# Altium PCB fuente 220V 12V 2A.PcbDoc
Units mil, origin at the board's own origin, x right, y up, seen from the top; angles counter-clockwise.
Board outline 5112.5 x 2362.5 mil, 2 copper layers (Top Layer, Bottom Layer), stack 65.792 mil thick; 92 components, 81 nets, 307 pads, 0 vias.
Unrouted connection lines stored in the file: 1.
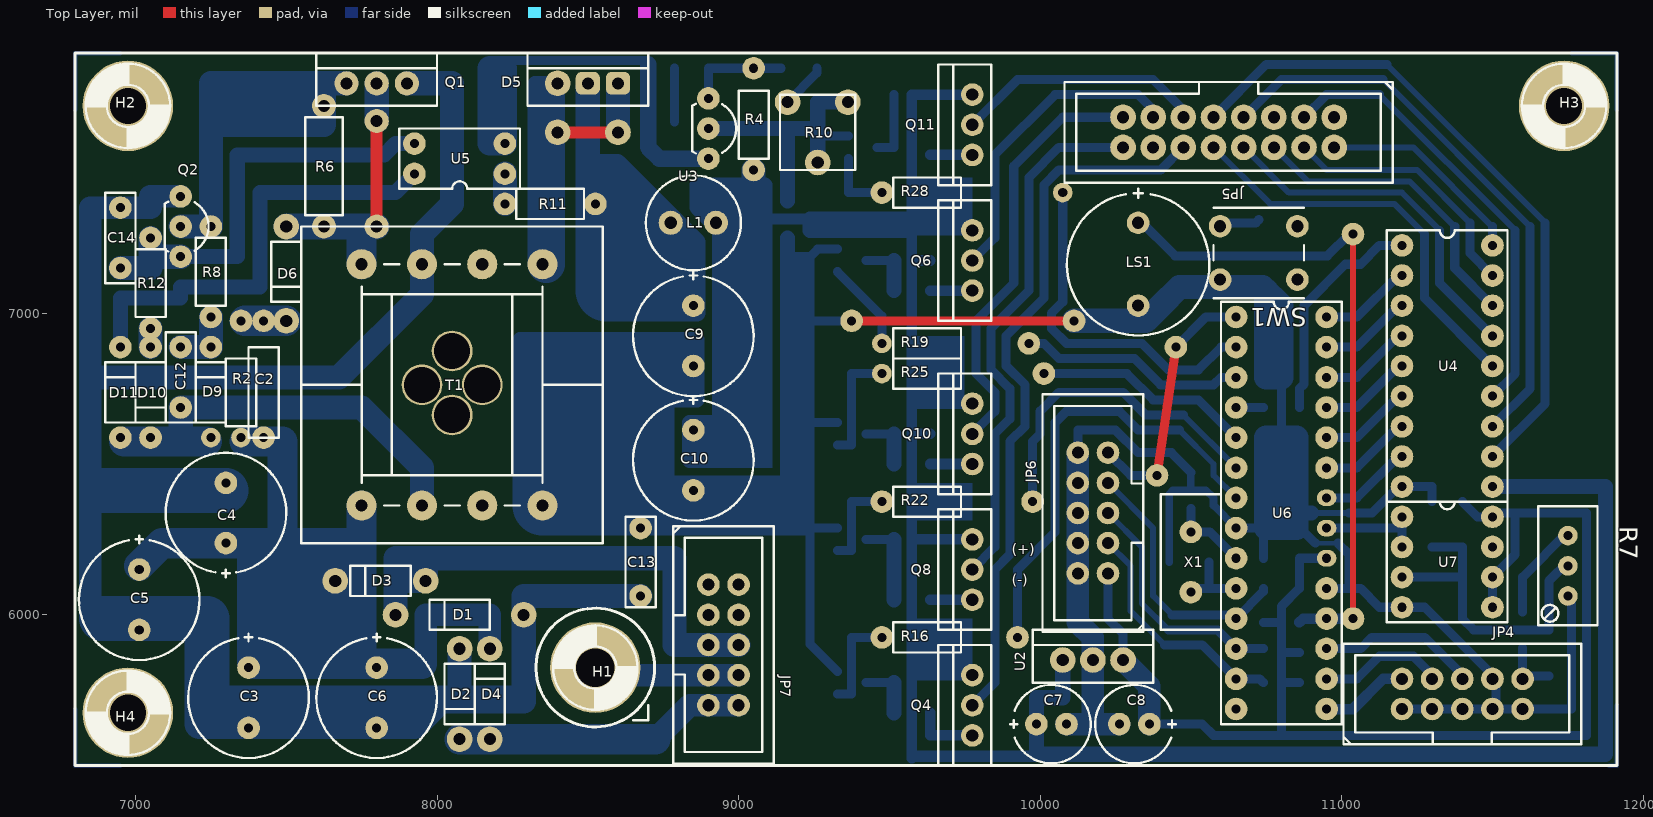
[diagram p0: Top Layer view]
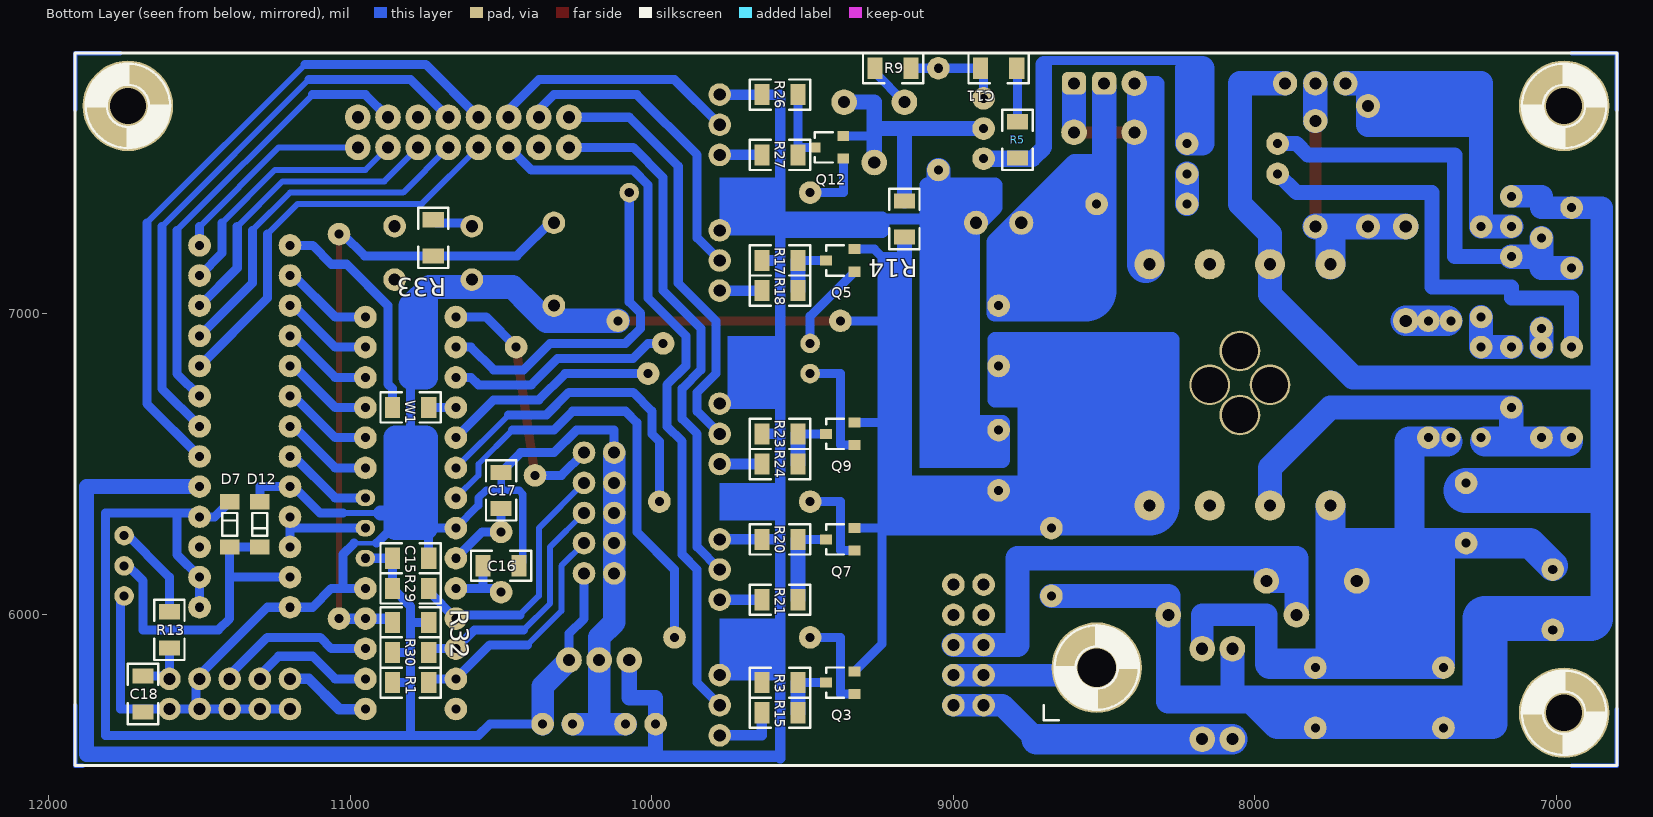
[diagram p1: Bottom Layer view, seen from below]
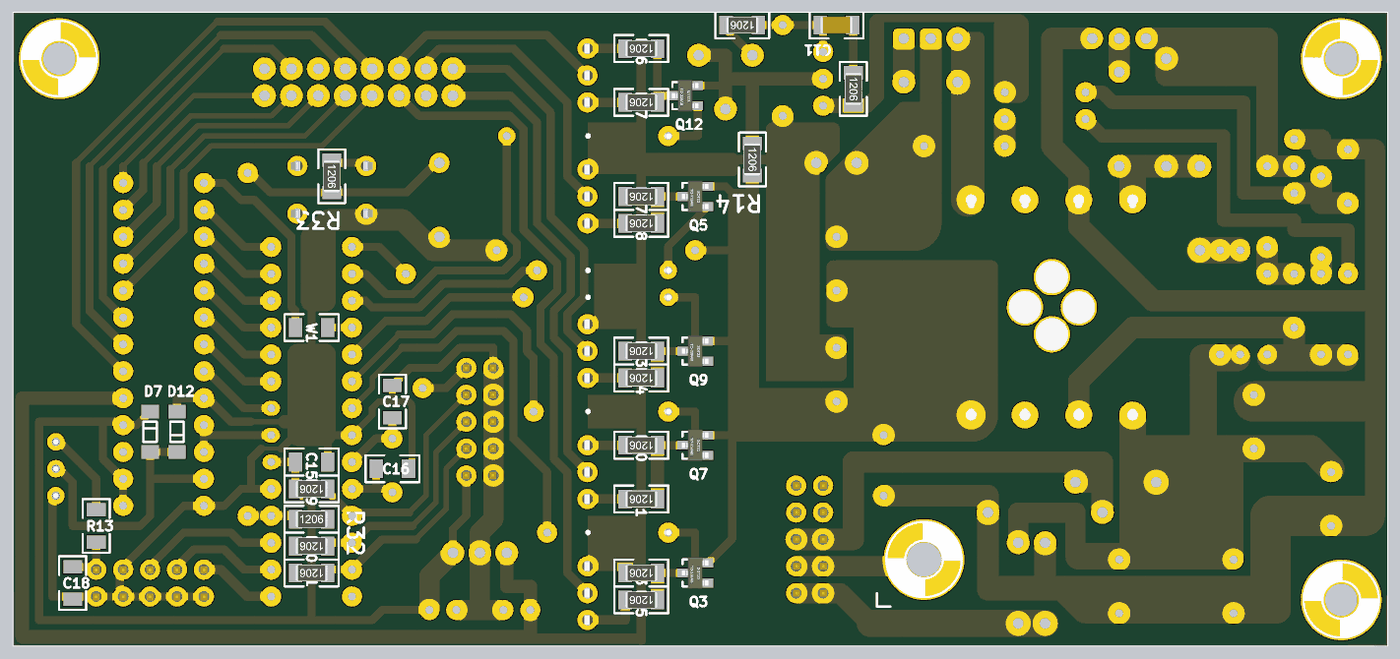
[diagram p2: 3D render of the assembled board from below, using the file's embedded part models]

## Layer stack, top to bottom
Top Layer: signal copper 1.4
Dielectric: core 62.9921, FR-4, Dk 4.8
Bottom Layer: signal copper 1.4

## Board outline
6800,5500 11912.5,5500 11912.5,7862.5 6800,7862.5

## Design rules (kind name [scope] priority, off if disabled: settings)
Clearance [All] p1: gap=12.5
PolygonConnect [All] p1: connectstyle=Relief reliefconductorwidth=10 reliefentries=4 polygonreliefangle="90 Angle"
RoutingVias [All] p1: holewidth=28 width=50 viastyle="Through Hole" minholewidth=28 minwidth=50 maxholewidth=28 maxwidth=50
SilkscreenOverComponentPads [All] p1: minsilkscreentomaskgap=10
SolderMaskExpansion [All] p1: expansion=4
Width [All] p1: maxlimit=1000 minlimit=10 preferedwidth=10
27 further rules are at their usual default settings.

## Components (designator, comment, footprint, x,y, rotation, side; value= is the part's Value field where it differs from the comment)
C2 "Cap" CAP200th 7425,6737.5 r270 top
C3 "Cap Pol" cap10mm 7375,5725 r270 top
C4 "Cap Pol" cap10mm 7300,6337.5 r90 top
C5 "Cap Pol" cap10mm 7012.5,6050 r270 top
C6 "Cap Pol" cap10mm 7800,5725 r270 top
C7 "Cap Pol" Cap6.5mm 10037.5,5637.5 r0 top
C8 "Cap Pol" Cap6.5mm 10312.5,5637.5 r180 top
C9 "Cap Pol" cap10mm 8850,6925 r270 top
C10 "Cap Pol" cap10mm 8850,6512.5 r270 top
C11 "Cap" C1206 8850,7812.5 r0 bottom
C12 "Cap" cap200th#1 7150,6787.5 r90 top
C13 "Cap" cap200th#2 8675,6175 r90 top
C14 "Cap" cap200th#1 6950,7250 r270 top
C15 "Cap" 1206NP 10800,6187.5 r180 bottom
C16 "Cap" 1206NP 10500,6162.5 r0 bottom
C17 "Cap" 1206NP 10500,6412.5 r270 bottom
C18 "Cap" 1206NP 11687.5,5737.5 r90 bottom
D1 "1N4007" diode300_1mm#1 8075,6000 r180 top
D2 "1N4007" diode300_1mm#2 8075,5737.5 r270 top
D3 "1N4007" diode300_1mm#2 7812.5,6112.5 r180 top
D4 "1N4007" diode300_1mm#2 8175,5737.5 r90 top
D5 "MBR20100" TO220#1 8500,7762.5 r0 top
D6 "UF4007" diode300_1mm#3 7500,7137.5 r270 top
D7 "1N4148" DSMD1MM 11400,6300 r270 bottom
D9 "1N4148" DIODE300#1 7250,6737.5 r90 top
D10 "Zener" DIODE300#2 7050,6737.5 r270 top
D11 "1N4148" DIODE300#2 6950,6737.5 r90 top
D12 "1N4148" DSMD1MM 11300,6300 r90 bottom
H1 "Agujero de montaje" agujero#1 8525,5825 r270 top
H2 "Agujero de montaje" agujero#2 6975,7687.5 r90 top
H3 "Agujero de montaje" agujero#2 11737.5,7687.5 r0 top
H4 "Agujero de montaje" agujero#2 6975,5675 r180 top
JP4 "IDC 5x2" idc5x2 11400,5737.5 r0 top
JP5 "Header8x2" idc8x2 10775,7600 r180 top
JP6 "IDC 5x2" idc5x2 10175,6337.5 r90 top
JP7 "IDC 5x2" idc5x2 8950,5900 r270 top
L1 "Inductor" ind8mm 8850,7300 r0 top
LS1 "Buzzer" buzzer12mm 10325,7162.5 r270 top
Q1 "MJE13007" TO220#2 7800,7762.5 r0 top
Q2 "2SC1815" to92 7150,7287.5 r270 top
Q3 "BC817-40" SOT23 9375,5775 r90 bottom
Q4 "IRF9520" TO220#3 9775,5700 r90 top
Q5 "BC817-40" SOT23 9375,7175 r90 bottom
Q6 "IRF9520" TO220#3 9775,7175 r90 top
Q7 "BC817-40" SOT23 9375,6250 r90 bottom
Q8 "IRF9520" TO220#3 9775,6150 r90 top
Q9 "BC817-40" SOT23 9375,6600 r90 bottom
Q10 "IRF9520" TO220#3 9775,6600 r90 top
Q11 "IRF9520" TO220#3 9775,7625 r90 top
Q12 "BC817-40" SOT23 9412.5,7550 r90 bottom
R1 "Resistencia 1206; 10Kohm" R1206 10800,5775 r0 bottom
R2 "Res" RES300TH#1 7350,6737.5 r90 top
R3 "Resistencia 1206; 1Kohm" R1206 9575,5775 r0 bottom
R4 "Res" RES300TH#2 9050,7625 r90 top
R5 "Res" R1206 8787.5,7575 r270 bottom
R6 "Res" res400th 7625,7487.5 r90 top
R7 "Preset" PRESET 11750,6162.5 r270 top
R8 "Res" RES300TH#3 7250,7137.5 r90 top
R9 "Res" R1206 9200,7812.5 r0 bottom
R10 "RVar" Preset6 9262.5,7600 r180 top
R11 "Res" RES300TH#3 8375,7362.5 r180 top
R12 "Res" RES300TH#3 7050,7100 r270 top
R13 "Res" 1206NP 11600,5950 r270 bottom
R14 "Resistencia 1206; 0ohm" R1206 9162.5,7312.5 r270 bottom
R15 "Resistencia 1206; 10ohm" R1206 9575,5675 r0 bottom
R16 "Resistencia 1206; 1Kohm" res300th#1 9625,5925 r180 top
R17 "Resistencia 1206; 1Kohm" R1206 9575,7175 r0 bottom
R18 "Resistencia 1206; 10ohm" R1206 9575,7075 r0 bottom
R19 "Resistencia 1206; 1Kohm" res300th#2 9625,6900 r180 top
R20 "Resistencia 1206; 1Kohm" R1206 9575,6250 r0 bottom
R21 "Resistencia 1206; 10ohm" R1206 9575,6050 r0 bottom
R22 "Resistencia 1206; 1Kohm" res300th#3 9625,6375 r180 top
R23 "Resistencia 1206; 1Kohm" R1206 9575,6600 r0 bottom
R24 "Resistencia 1206; 10ohm" R1206 9575,6500 r0 bottom
R25 "Resistencia 1206; 1Kohm" res300th#4 9625,6800 r180 top
R26 "Resistencia 1206; 1Kohm" R1206 9575,7725 r0 bottom
R27 "Resistencia 1206; 10ohm" R1206 9575,7525 r0 bottom
R28 "Resistencia 1206; 1Kohm" res300th#5 9625,7400 r180 top
R29 "Resistencia 1206; 10Kohm" R1206 10800,6087.5 r0 bottom
R30 "Resistencia 1206; 10Kohm" R1206 10800,5875 r0 bottom
R32 "Resistencia 1206; 10Kohm" R1206 10800,5975 r180 bottom
R33 "Resistencia 1206; 10Kohm" R1206 10725,7250 r270 bottom
SW1 "SW_T_5MM" SW_T_5MM 10725,7200 r180 top
T1 "Transformer 2" "COSMO - EE 2507" 8050,6762.5 r180 top
U2 "LM7805" TO220#4 10175,5850 r0 top
U3 "TL431" TO92 8900,7612.5 r270 top
U4 "ULN2803" DIP18Z 11200,7225 r0 top
U5 "PC817" DIP4Z 8225,7462.5 r180 top
U6 "PIC18F2550" DIP28Z2 10650,6987.5 r0 top
U7 "MCP6002" dip8z 11200,6325 r0 top
W1 "CABLE" 1206NP 10800,6687.5 r180 bottom
X1 "XTAL" XTAL1 10500,6175 r90 top

## Footprints (in the part's own frame and the unit in brackets; to place one, negate y for a bottom-side part, rotate by r counter-clockwise, add the part's x,y. Pads: shape width x height; smd on the part's side, far side on the other; paste and mask are expansions set on the pad)
1206NP [mil]
  rect 50x70 smd: 1(-60,0) 2(60,0)
  silkscreen extent -100,-50 100,50
agujero#1 [mm] "AGUJERO DE MONTAJE"
  round 7.62 hole 3.25: 1(0,0)
  silkscreen extent -3.56,-3.56 4.44,4.45
agujero#2 [mm] "AGUJERO DE MONTAJE"
  round 7.62 hole 3.048: 1(0,0)
  silkscreen extent -3.56,-3.56 4.44,4.44
buzzer12mm [mil] "BUZZER"
  round 75 hole 40: 1(-137.5,0) 2(137.5,0)
  silkscreen extent -250,-236 236,236
C1206 [mil]
  rect 50x70 smd: 1(-60,0) 2(60,0)
  silkscreen extent -100,-50 100,50, body extent -63,-31 63,31, height 33
Cap6.5mm [mil] "CAPACITOR ELECTROLÍTICO"
  round 75 hole 30: 1(-50,0) 2(50,0)
  silkscreen extent -138,-130 130,130
cap10mm [mil] "CAPACITOR ELECTROLÍTICO"
  round 75 hole 30: 1(-100,0) 2(100,0)
  silkscreen extent -212,-200 200,200
CAP200th [mil] "CAPACITOR THROUGH-HOLE"
  round 75 hole 30: 1(-237.5,0) 2(150,0)
  silkscreen extent -150,-50 150,50
cap200th#1 [mil] "CAPACITOR THROUGH-HOLE"
  round 75 hole 30: 1(-100,0) 2(100,0)
  silkscreen extent -150,-50 150,50
cap200th#2 [mil] "CAPACITOR THROUGH-HOLE"
  round 75 hole 30: 1(-112.5,0) 2(112.5,0)
  silkscreen extent -150,-50 150,50
"COSMO - EE 2507" [mil]
  round 100 hole 40: 1(-300,400) 2(-300,-400) 3(100,400) 4(100,-400) 5(300,400) 6(300,-400) 7(-100,400) 8(-100,-400)
  silkscreen extent -500,-525 500,525, body extent -492,-500 492,508, height 772
DIODE300#1 [mil] "DIODO THROUGH-HOLE"
  round 65 hole 30: 1(-150,0)
  round 75 hole 30: 2(150,0)
  silkscreen extent -100,-50 100,50
DIODE300#2 [mil] "DIODO THROUGH-HOLE"
  round 75 hole 30: 1(-150,0) 2(150,0)
  silkscreen extent -100,-50 100,50
diode300_1mm#1 [mil]
  round 85 hole 40: 1(-212.5,0) 2(212.5,0)
  silkscreen extent -100,-50 100,50
diode300_1mm#2 [mil]
  round 85 hole 40: 1(-150,0) 2(150,0)
  silkscreen extent -100,-50 100,50
diode300_1mm#3 [mil]
  round 85 hole 40: 1(-150,0) 2(162.5,0)
  silkscreen extent -100,-50 100,50
DIP4Z [mil] "ZOCALO DIP 4"
  round 75 hole 30: 1(0,0) 2(0,-100) 3(300,-100) 4(300,0)
  silkscreen extent -50,-150 350,50
dip8z [mil] "ZOCALO DIP 8"
  round 75 hole 30: 1(0,0) 2(0,-100) 3(0,-200) 4(0,-300) 5(300,-300) 6(300,-200) 7(300,-100) 8(300,0)
  silkscreen extent -50,-350 350,50
DIP18Z [mil] "ZOCALO DIP18"
  round 75 hole 30: 1(0,0) 2(0,-100) 3(0,-200) 4(0,-300) 5(0,-400) 6(0,-500) 7(0,-600) 8(0,-700) 9(0,-800) 10(300,-800) 11(300,-700) 12(300,-600) 13(300,-500) 14(300,-400) 15(300,-300) 16(300,-200) 17(300,-100) 18(300,0)
  silkscreen extent -50,-850 350,50
DIP28Z2 [mil]
  round 75 hole 30: 1(0,0) 2(0,-100) 3(0,-200) 4(0,-300) 5(0,-400) 6(0,-500) 7(0,-600) 8(0,-700) 9(0,-800) 10(0,-900) 11(0,-1000) 12(0,-1100) 13(0,-1200) 14(0,-1300) 15(300,-1300) 16(300,-1200) 17(300,-1100) 18(300,-1000) 19(300,-900) 23(300,-500) 24(300,-400) 25(300,-300) 26(300,-200) 27(300,-100) 28(300,0)
  oval 65x55 hole 30: 20(300,-800) 21(300,-700) 22(300,-600)
  silkscreen extent -50,-1350 350,50
DSMD1MM [mil] "DIODO SMD"
  rect 50x65 smd: 1(75,0) 2(-75,0)
  silkscreen extent -38,-25 38,25
idc5x2 [mil]
  round 75 hole 40: 1(-200,-50) 2(-200,50) 3(-100,-50) 4(-100,50) 5(0,-50) 6(0,50) 7(100,-50) 8(100,50) 9(200,-50) 10(200,50)
  silkscreen extent -394,-167 394,167, body extent -400,-169 400,180, height 117
idc8x2 [mil]
  round 85 hole 40: 1(-200,-50) 2(-200,50) 3(-100,-50) 4(-100,50) 5(0,-50) 6(0,50) 7(100,-50) 8(100,50) 9(200,-50) 10(200,50) 11(300,-50) 12(300,50) 13(400,-50) 14(400,50) 15(500,-50) 16(500,50)
  silkscreen extent -394,-167 694,167
ind8mm [mil]
  round 80 hole 40: 1(-75,0) 2(75,0)
  silkscreen extent -157,-157 157,157
PRESET [mil]
  round 65 hole 30: 1(-100,0) 2(0,0) 3(100,0)
  silkscreen extent -197,-98 197,98, body extent -188,-95 188,95, height 455
Preset6 [mil]
  round 85 hole 40: 1(-100,-100) 2(0,100) 3(100,-100)
  silkscreen extent -125,-125 125,125
R1206 [mil]
  rect 50x70 smd: 1(-60,0) 2(60,0)
  silkscreen extent -100,-50 100,50, body extent -63,-31 63,31, height 34
RES300TH#1 [mil] "RESISTENCIA THROUGH-HOLE"
  round 65 hole 30: 1(-150,0)
  round 75 hole 30: 2(237.5,0)
  silkscreen extent -112,-50 112,50
RES300TH#2 [mil] "RESISTENCIA THROUGH-HOLE"
  round 75 hole 30: 1(-150,0) 2(187.5,0)
  silkscreen extent -112,-50 112,50
RES300TH#3 [mil] "RESISTENCIA THROUGH-HOLE"
  round 75 hole 30: 1(-150,0) 2(150,0)
  silkscreen extent -112,-50 112,50
res300th#1 [mil] "RESISTENCIA THROUGH-HOLE"
  round 75 hole 30: 1(-300,0) 2(150,0)
  silkscreen extent -112,-50 112,50, body extent -159,-47 162,47, height 98
res300th#2 [mil] "RESISTENCIA THROUGH-HOLE"
  round 75 hole 30: 1(-337.5,0)
  round 65 hole 30: 2(150,0)
  silkscreen extent -112,-50 112,50, body extent -159,-47 162,47, height 98
res300th#3 [mil] "RESISTENCIA THROUGH-HOLE"
  round 75 hole 30: 1(-350,0) 2(150,0)
  silkscreen extent -112,-50 112,50, body extent -159,-47 162,47, height 98
res300th#4 [mil] "RESISTENCIA THROUGH-HOLE"
  round 75 hole 30: 1(-387.5,0)
  round 65 hole 30: 2(150,0)
  silkscreen extent -112,-50 112,50, body extent -159,-47 162,47, height 98
res300th#5 [mil] "RESISTENCIA THROUGH-HOLE"
  round 65 hole 30: 1(-450,0)
  round 75 hole 30: 2(150,0)
  silkscreen extent -112,-50 112,50, body extent -159,-47 162,47, height 98
res400th [mil]
  round 80 hole 40: 1(-200,0) 2(200,0)
  silkscreen extent -162,-63 162,63
SOT23 [mm] "SOT23"
  rect 0.85x1 smd: 1(-0.95,-1.2) 2(0.95,-1.2) 3(0,1.2)
  silkscreen extent -1.27,-0.3 1.28,1.2, body extent -1.5,-1.25 1.5,1.25, height 1.09
SW_T_5MM [mm] "PULSADOR DE 2 CONTACTOS, 4 TERMINALES"
  round 1.905 hole 1.016: 1(3.25,-2.25) 2(3.25,2.25) 3(-3.25,-2.25) 4(-3.25,2.25)
  silkscreen extent -3.81,-3.81 3.81,3.81, body extent -3.87,-3.01 3.87,3.02, height 5.01
to92 [mil] "DISPOSITIVO DE ENCAPSULADO TO-92"
  round 75 hole 30: 1(-100,0) 2(0,0) 3(100,0)
  silkscreen extent -83,-53 83,92
TO92 [mil] "DISPOSITIVO DE ENCAPSULADO TO-92"
  round 75 hole 30: 1(-100,0) 2(0,0) 3(100,0)
  silkscreen extent -83,-53 83,92
TO220#1 [mil] "DISPOSITIVO DE ENCAPSULADO TO-220"
  round 85 hole 40: 1(-100,0)
  rrect50% 80x75 hole 40: 2(0,0) 3(100,0)
  silkscreen extent -200,-75 200,100
TO220#2 [mil] "DISPOSITIVO DE ENCAPSULADO TO-220"
  round 80 hole 40: 1(-100,0) 2(0,0) 3(100,0)
  silkscreen extent -200,-75 200,100
TO220#3 [mil] "DISPOSITIVO DE ENCAPSULADO TO-220"
  round 75 hole 40: 1(-100,0) 2(0,0) 3(100,0)
  silkscreen extent -200,-63 200,113, body extent -195,-63 195,113, height 769
TO220#4 [mil] "DISPOSITIVO DE ENCAPSULADO TO-220"
  round 85 hole 40: 1(-100,0) 2(0,0) 3(100,0)
  silkscreen extent -200,-75 200,100
XTAL1 [mil] "CRISTAL DE CUARZO"
  round 75 hole 30: 1(-100,0) 2(100,0)
  silkscreen extent -225,-100 225,100

## Part data
C2 C11 C12 C13 C14 C15 C16 C17 C18: "Capacitor"
C3 C4 C5 C6 C7 C8 C9 C10: "Capacitor Polarizado"
D1 D2 D3 D4: "1A 1000V General Purpose Rectifier"
D5: library part MBR10100, "Schottky Diode 10A 45V"
D6: library part 1N4007, "1A 1000V General Purpose Rectifier"
D7 D9 D11 D12: "High Conductance Fast Diode"
D10: "Zener Diode"
JP5: "Header 8x2"
Q1: library part TIP41C, "6A 100V NPN Bipolar Transistor"
Q2: "NPN Bipolar Transistor"
Q4 Q6 Q8 Q10 Q11: library part IRF9530, "100V  12A 0.3 ohm Power Field Effect Transistor"
R2 R4 R5 R6 R8 R9 R11 R12 R13: "Resistor"
R7 R10: "Resistencia Variable"
T1: "Three-winding Transformer"
U2: library part "LM78XX (v1)", "3-Terminal Positive Regulator"
U3: "Adjustable Zener Diode"
U4: "Darlington Transistor Array"
U5: "Optoaislador"
U6: "Enhanced FLASH Microcontroller"
U7: "1 MHz Bandwidth Low Power Op Amp"
W1: "Cable"
X1: "Crystal Oscillator"

## Free pads (board coordinates)
  round 75 hole 30: 0(10387.5,6462.5) 0(11037.5,5987.5) 0(11037.5,7262.5) 1(9375,6975) 1(10112.5,6975) 1(10450,6887.5)
  round 80 hole 40: 1(7800,7287.5) 2(7800,7637.5)
  round 135 hole 120: 1(8150,6762.5) 2(7950,6762.5) 3(8050,6875) 4(8050,6662.5)
  round 85 hole 40: 3(8400,7600) 4(8600,7600)

## Nets (pads, with @x,y where several pads share a name; then routed paths per layer and width w, separated by ;. In a path a pad name is that pad's centre, name@x,y a point inside that pad or via, vN(x,y) a via of type N, cw(c..) or ccw(c..) an arc to the next point about the centre after c; other vN are vias at no path point)
A: JP5.2 U4.18 | length 696.2
  Bottom Layer w20: JP5.2 11237.5,7550 11500,7287.5
  Bottom Layer w30: U4.18 11500,7287.5
B: JP5.4 U4.17 | length 859.6
  Bottom Layer w20: JP5.4 10950,7475 11250,7475 11425,7300
  Bottom Layer w30: 11425,7300 11425,7200 U4.17
C: JP5.9 U4.11 | length 2237.4
  Bottom Layer w20: 11150,7825 11675,7300
  Bottom Layer w30: JP5.9 10750,7825 11150,7825 ; U4.11 11675,6700 11675,7300
D: JP5.7 U4.12 | length 1918
  Bottom Layer w20: 11137.5,7775 11625,7287.5
  Bottom Layer w30: JP5.7 10800,7775 11137.5,7775 ; U4.12 11625,6750 11625,7287.5
DA: U4.1 W1.1 | length 751.6
  Bottom Layer w30: W1.1 10860,6750 10875,6765 10875,7025 11012.5,7162.5 11062.5,7162.5 11125,7225 U4.1
DB: U4.2 U6.28 | length 307
  Bottom Layer w30: U6.28 11050,6987.5 11187.5,7125 U4.2
DC: U4.8 U6.22 | length 307
  Bottom Layer w30: U6.22 11050,6387.5 11187.5,6525 U4.8
DD: U4.7 U6.23 | length 294.5
  Bottom Layer w30: U6.23 11050,6487.5 U4.7@11187.5,6625
DDP: U4.6 U6.24 | length 294.5
  Bottom Layer w30: U6.24 11050,6587.5 U4.6@11187.5,6725
DE: U4.5 U6.25 | length 294.5
  Bottom Layer w30: U6.25 11050,6687.5 U4.5@11187.5,6825
DF: U4.3 U6.27 | length 294.5
  Bottom Layer w30: U6.27 11050,6887.5 U4.3@11187.5,7025
DG: U4.4 U6.26 | length 307
  Bottom Layer w30: U6.26 11050,6787.5 11187.5,6925 U4.4
DP: JP5.3 U4.13 | length 1498.5
  Bottom Layer w20: 11125,7725 11575,7275
  Bottom Layer w30: JP5.3 10950,7725 11125,7725 ; U4.13 11575,6800 11575,7275
E: JP5.10 U4.14 | length 1349.8
  Bottom Layer w20: JP5.10 10762.5,7362.5 11175,7362.5 11275,7262.5
  Bottom Layer w30: 11275,7262.5 11275,7050 U4.14
EARTH: H1.1 JP7.7 JP7.8 | length 550
  Bottom Layer w75: H1.1@8550,5800 JP7.8 JP7.7
F: JP5.6 U4.16 | length 1023
  Bottom Layer w20: JP5.6 10887.5,7437.5 11225,7437.5 11375,7287.5
  Bottom Layer w30: 11375,7287.5 11375,7150 U4.16
G: JP5.8 U4.15 | length 1186.4
  Bottom Layer w20: JP5.8 10825,7400 11200,7400 11325,7275
  Bottom Layer w30: 11325,7275 11325,7100 U4.15
GND: C7.2 C8.2 C9.2 C10.2 C13.2 C15.2 C16.1 C17.1 C18.1 D12.1 JP4.1 JP4.3 JP4.5 JP4.7 JP4.8 JP4.9 JP6.2 JP6.4 JP6.6 JP6.8 JP6.10 LS1.2 pad.1@9375,6975 pad.1@10112.5,6975 Q3.2 Q5.2 Q7.2 Q9.2 R7.3 R14.2 SW1.2 T1.1 U2.2 U4.9 U6.8 U6.19 U7.4 | length 17598.4
  Top Layer w30: pad.1@9375,6975 pad.1@10112.5,6975
  Bottom Layer w15: 10912.5,6237.5 10987.5,6237.5
  Bottom Layer w20: 10850,6337.5 10875,6337.5 11025,6337.5
  Bottom Layer w25: C16.1@10427.5,6175 10427.5,6400 10440,6412.5 10500,6412.5 ; C17.1 10500,6412.5 ; U6.8 10575,6362.5 10575,6387.5 10550,6412.5 10500,6412.5
  Bottom Layer w30: 9159.65,7175 9225,7175 ; 9162.5,7112.5 9237.5,7187.5 ; 9172.15,7187.5 9237.5,7187.5 ; 9187.5,7097.15 9187.5,7162.5 ; 9212.5,6950 9212.5,7162.5 ; Q3.2 9237.5,5902.66 9237.5,6287.5 ; Q7.2 9327.76,6287.5 9237.5,6287.5 ; Q9.2 9327.76,6637.5 9237.5,6637.5 ; Q5.2 9262.4,7212.4 9237.5,7187.5 ; pad.1@9375,6975 9237.5,6975 ; JP6.10 10125,6612.5 10250,6612.5 10325,6537.5 10435,6537.5 C17.1 ; U2.2 U2.2@10175,5875 ; U6.8 10750,6287.5 10740,6285 C15.2 ; 10800,6587.5 10800,6787.5 ; 10825,6325 10912.5,6237.5 ; U6.19 11025,6087.5 ; 10987.5,6237.5 11025,6200 11025,6087.5 ; 11025,6337.5 11100,6337.5 11187.5,6425 U4.9 11300,6425 D12.1 ; JP4.1@11212.5,5687.5 JP4.7@11512.5,5687.5 ; R7.3@11750,6075 11762.5,6062.5 11762.5,5687.5 JP4.7@11512.5,5687.5 ; 9237.5,6287.5 9237.5,6637.5 ; 9237.5,6637.5 9237.5,6975 ; 9237.5,6975 9237.5,7187.5 ; 11025,6087.5 11062.5,6087.5 11125,6025 U7.4 11275,6025 11512.5,5787.5 JP4.7@11512.5,5687.5
  Bottom Layer w50: 8275,6725 8275,6912.5 8850,6912.5 ; 8625,6712.5 8762.5,6712.5 ; 8762.5,6362.5 8762.5,6712.5 ; 8862.5,6912.5 8862.5,6712.5 8762.5,6712.5 ; 9025,6287.5 9162.5,6287.5 ; 9037.5,6437.5 9162.5,6437.5 ; 9100,6400 9162.5,6287.5 ; 9112.5,6425 9175,6425 ; R14.2@9162.5,7250 9162.5,7112.5 9162.5,6437.5 ; 9200,6300 9200,6425 ; 9200,7112.5 9200,6437.5 ; 9225,6287.5 9162.5,6287.5 ; 9225,6425 9200,6425 ; 9225,6437.5 9200,6437.5 ; 10875,6337.5 10900,6337.5 ; 9162.5,6287.5 9175,6425 ; 9162.5,6437.5 9200,6437.5 ; 9162.5,6437.5 9175,6425 ; 9175,6425 9200,6425 ; 9200,6425 9200,6437.5
  Bottom Layer w75: C7.2 10175,5637.5 ; JP6.10 10125,5975 10175,5925 U2.2@10175,5875 ; U2.2 10175,5637.5 ; C8.2 10175,5637.5
  Bottom Layer w80: pad.1@10112.5,6975 10350,6975 10400,7025 10462.5,7087.5 10737.5,7087.5 10800,7025 10800,6787.5 10750,6787.5 10750,7075 ; 10787.5,6587.5 10750,6587.5 10750,6287.5 10850,6287.5 ; 10800,6337.5 10850,6337.5 10850,6587.5 ; 10850,6287.5 10850,6587.5 ; 10850,6287.5 10800,6287.5 10800,6587.5 10850,6587.5
  Bottom Layer w200: 8475,6812.5 8475,6362.5 ; 8650,6812.5 8650,6362.5 ; 8787.5,6812.5 8350,6812.5 T1.1 8475,6362.5 ; 9100,6362.5 8762.5,6362.5 8650,6362.5 ; 8475,6362.5 8650,6362.5
GND2: C3.2 C4.2 C5.2 C6.2 C13.1 C14.1 D1.1 D2.1 Q1.3 Q2.1 T1.4 | length 9270.2
  Bottom Layer w75: 6850,5987.5 6850,7350 C14.1 7050,7350 7050,7387.5 Q2.1
  Bottom Layer w80: 6875,6787.5 7675,6787.5 7950,7062.5 T1.4 7950,7262.5 8050,7362.5 8050,7762.5 Q1.3 ; 7237.5,5725 8287.5,5725 ; 8000,5712.5 8287.5,5712.5 D1.1 8287.5,6062.5 C13.1 ; 8075,5725 D2.1
  Bottom Layer w100: 7212.5,6012.5 7212.5,5637.5 C6.2@7775,5637.5 ; 7912.5,5687.5 7793.07,5644.07 C6.2@7775,5637.5 ; 8000,5712.5 7925,5637.5 C6.2@7775,5637.5
  Bottom Layer w150: 6887.5,5987.5 7237.5,5987.5 ; 6887.5,6412.5 C4.2@7300,6412.5 ; 7237.5,5675 7237.5,5987.5 ; 7237.5,5725 7237.5,5987.5 ; 7337.5,5687.5 7912.5,5687.5
GND3: Q12.2 R10.1 R10.2 R14.1 U3.2 | length 1005.3
  Bottom Layer w30: 9262.5,7587.4 Q12.2
  Bottom Layer w50: U3.2 9162.5,7612.5 ; R14.1 9162.5,7612.5 ; R10.2 9262.5,7587.4 9262.5,7612.5 ; R10.1 9262.5,7700 9262.5,7612.5 ; 9162.5,7612.5 9262.5,7612.5
IU0: R28.1 U6.2 | length 1166.1
  Bottom Layer w30: R28.1 10075,7037.5 10037.5,7000 10037.5,6950 10087.5,6900 10337.5,6900 10425,6812.5 10525,6812.5 10600,6887.5 U6.2
IU1: R19.1 U6.3 | length 754.8
  Bottom Layer w30: R19.1 10012.5,6900 10062.5,6850 10312.5,6850 10400,6762.5 10575,6762.5 10600,6787.5 U6.3
IU2: R16.1 U6.7 | length 1520.9
  Bottom Layer w20: 10462.5,6612.5 10575,6500 10575,6462.5 U6.7
  Bottom Layer w30: R16.1 9925,6150 10050,6275 10050,6637.5 10087.5,6675 10262.5,6675 10325,6612.5 10462.5,6612.5
IU3: R25.1 U6.5 | length 738
  Bottom Layer w30: R25.1@10000,6800 10287.5,6800 10375,6712.5 10525,6712.5 U6.5
IU4: R22.1 U6.6 | length 1089.8
  Bottom Layer w20: 10475,6662.5 U6.6
  Bottom Layer w30: R22.1 9975,6575 10000,6600 10000,6675 10062.5,6737.5 10275,6737.5 10350,6662.5 10475,6662.5
L: D2.2 D4.1 JP7.9 JP7.10 | length 971.6
  Bottom Layer w75: 8725,5587.5 8837.5,5700 JP7.9 JP7.10
  Bottom Layer w100: D2.2 D4.1 8725,5587.5
N: D1.2 D3.1 JP7.5 JP7.6 | length 1862.5
  Bottom Layer w80: D1.2 7862.5,6187.5 ; 7962.5,6187.5 D3.1 7862.5,6112.5 7862.5,6187.5 ; JP7.6 JP7.5 8787.5,5900 8787.5,6187.5 7862.5,6187.5
NetC2_1: C2.1 D6.2 R2.2 | length 137.5
  Bottom Layer w100: R2.2@7362.5,6975 D6.2
NetC2_2: C2.2 C3.1 C4.1 C5.1 C6.1 D3.2 D4.2 R2.1 T1.5 | length 2806.1
  Bottom Layer w75: 7962.5,5837.5 7962.5,6000 8175,6000 D4.2
  Bottom Layer w100: C5.1@7012.5,6162.5 7087.5,6237.5 C4.1 7637.5,6237.5 ; R2.1@7362.5,6575 7487.8,6575 7487.8,6237.5 ; C3.1@7387.5,5837.5 7662.5,5837.5 ; 7637.5,6162.5 7637.5,6237.5 ; 7637.8,5850.3 7637.8,6162.2 ; 7662.8,5850.3 7662.5,5837.5 ; T1.5 7750,6237.5 7637.5,6237.5 ; 7950,5837.5 7662.5,5837.5
NetC9_1: C9.1 D5.2 L1.1 R11.1 | length 3582.6
  Bottom Layer w55: 8512.5,7500 8600,7500 ; 8550,7325 8775,7325 8600,7500 ; 8562.5,7000 8862.5,7000 8862.5,7237.5 8600,7500 ; 8562.5,7487.5 8837.5,7212.5 ; C9.1@8850,7012.5 8850,7237.5
  Bottom Layer w80: 8500,7150 D5.2@8500,7750 ; 8525,7475 8562.5,7475
  Bottom Layer w205: 8562.5,7412.5 8562.5,7250 ; 8562.5,7250 8562.5,7075 8737.5,7075 8737.5,7250 8562.5,7250
NetC11_1: C11.1 R5.1 | length 177.5
  Bottom Layer w30: R5.1 C11.1@8787.5,7812.5
NetC11_2: C11.2 R4.2 R9.1 U3.1 | length 340
  Bottom Layer w30: U3.1 8900,7812.5 C11.2 R4.2 R9.1
NetC12_1: C12.1 D9.1 D10.2 D11.1 T1.3 | length 1395.3
  Bottom Layer w80: 7150,6575 C12.1 7750,6687.5 7950,6487.5 T1.3
  Bottom Layer w100: D11.1@6962.5,6575 7150,6575 D9.1@7237.5,6575
NetC12_2: C12.2 D9.2 R8.1 | length 200
  Bottom Layer w80: C12.2 D9.2 7250,6937.5 R8.1
NetC14_2: C14.2 Q2.3 R12.1 U5.3 | length 1490.5
  Bottom Layer w50: Q2.3 7337.5,7187.5 7337.5,7525 7725,7525 7775,7525 7825,7525 7862.5,7562.5 U5.3
  Bottom Layer w80: C14.2 7050,7150 R12.1 7050,7187.5 Q2.3
NetC16_2: C16.2 U6.10 X1.1 | length 222.5
  Bottom Layer w30: X1.1@10512.5,6087.5 U6.10 ; 10560,6090 C16.2@10560,6175
NetC17_2: C17.2 U6.9 X1.2 | length 276.2
  Bottom Layer w30: X1.2 10560,6275 10562.5,6275 U6.9 U6.9@10635,6187.5 ; X1.2@10500,6277.5 C17.2
NetD5_1: D5.1 D5.3 pad.3@8400,7600 pad.4@8600,7600 T1.2 | length 1243.8
  Top Layer w40: pad.3@8400,7600 pad.4@8600,7600
  Bottom Layer w50: 8325,7631.25 8325,7762.5 D5.1 pad.3@8400,7637.5
  Bottom Layer w80: pad.4@8600,7600 D5.3@8600,7750
  Bottom Layer w125: T1.2@8362.5,7162.5 8362.5,7725
NetD6_1: D6.1 pad.1@7800,7287.5 pad.2@7800,7637.5 Q1.2 R6.1 T1.6 | length 975
  Top Layer w40: pad.1@7800,7287.5 pad.2@7800,7637.5
  Bottom Layer w80: pad.2@7800,7637.5 Q1.2
  Bottom Layer w85: R6.1 D6.1 pad.1@7800,7287.5
  Bottom Layer w100: T1.6 7750,7237.5
NetD7_1: D7.1 D12.2 R7.2 U7.3 | length 1091.4
  Bottom Layer w30: U7.3 11400,6125 ; D12.2 D7.1 11400,6125 ; R7.2@11750,6175 11687.5,6112.5 11687.5,5950 11437.5,5950 11400,5987.5 11400,6125
NetD10_1: D10.1 R12.2 | length 62.5
  Bottom Layer w80: D10.1 R12.2
NetD11_2: D11.2 U5.4 | length 1513.4
  Bottom Layer w50: D11.2 6950,7050 7150,7050 7150,7087.5 7412.5,7087.5 7412.5,7400 7512.5,7400 7862.5,7400 U5.4
NetQ1_2: Q1.1 Q2.2 R6.2 R8.2 | length 1912.5
  Bottom Layer w80: Q2.2 R8.2 7250,7625 ; 7250,7687.5 R6.2 ; Q1.1 7625,7762.5 ; 7250,7625 7250,7762.5 7625,7762.5 ; 7250,7625 7625,7625 7625,7762.5
NetQ3_1: Q3.1 R16.2 | length 334.6
  Bottom Layer w30: Q3.1 9375,5737.6 9375,5925 R16.2
NetQ3_3: Q3.3 R3.1 R15.1 | length 192.8
  Bottom Layer w30: Q3.3 R3.1
  Bottom Layer w50: R15.1 R3.1
NetQ4_1: Q4.1 R15.2 | length 215
  Bottom Layer w35: R15.2 9635,5600 Q4.1
NetQ5_1: Q5.1 R19.2 | length 298.6
  Bottom Layer w30: Q5.1 9475,6990.35 R19.2
NetQ5_3: Q5.3 R17.1 R18.1 | length 192.8
  Bottom Layer w30: Q5.3 R17.1
  Bottom Layer w50: R18.1 R17.1
NetQ6_1: Q6.1 R18.2 | length 140
  Bottom Layer w35: R18.2 Q6.1
NetQ7_1: Q7.1 R22.2 | length 309.6
  Bottom Layer w30: Q7.1 9375,6212.6 9375,6375 R22.2
NetQ7_3: Q7.3 R20.1 R21.1 | length 292.8
  Bottom Layer w30: Q7.3 R20.1
  Bottom Layer w50: R21.1 R20.1
NetQ8_1: Q8.1 R21.2 | length 140
  Bottom Layer w35: R21.2 Q8.1
NetQ9_1: Q9.1 R25.2 | length 384.7
  Bottom Layer w30: Q9.1 9375,6562.6 ; 9375,6562.5 9375,6800 R25.2
NetQ9_3: Q9.3 R23.1 R24.1 | length 192.8
  Bottom Layer w30: Q9.3 R23.1
  Bottom Layer w50: R24.1 R23.1
NetQ10_1: Q10.1 R24.2 | length 140
  Bottom Layer w35: R24.2 Q10.1
NetQ11_1: Q11.1 R27.2 | length 140
  Bottom Layer w35: R27.2 Q11.1
NetQ12_1: Q12.1 R28.2 | length 222.3
  Bottom Layer w30: Q12.1 9365.26,7400 R28.2
NetQ12_3: Q12.3 R26.1 R27.1 | length 230.3
  Bottom Layer w30: Q12.3 9515,7550 R26.1
NetR5_2: R5.2 U3.3 U5.2 | length 1565.5
  Bottom Layer w30: 8225,7837.5 8700,7837.5
  Bottom Layer w55: 8700,7825 8700,7550 8737.5,7512.5 U3.3
  Bottom Layer w80: 8175,7562.5 U5.2 8225,7812.5 8175,7812.5 8175,7562.5
NetR7_1: R7.1 R13.1 | length 327.1
  Bottom Layer w30: R13.1 11600,6125 R7.1@11750,6275
NetR9_2: R9.2 R10.3 | length 152.9
  Bottom Layer w30: R10.3 9260,7797.5 R9.2
NetR11_2: R11.2 U5.1 | length 100
  Bottom Layer w80: R11.2 U5.1
NetR33_1: R33.1 SW1.1 | length 136.8
  Bottom Layer w30: SW1.1 10608.46,7300 10715,7300 R33.1
NetU6_4: U6.4 W1.2 | length 90
  Bottom Layer w30: U6.4 W1.2
PIN15: JP4.2 U6.15 | length 303.9
  Bottom Layer w35: U6.15 11037.5,5687.5 11137.5,5787.5 JP4.2@11212.5,5787.5
PIN16: JP4.4 U6.16 | length 424.6
  Bottom Layer w30: U6.16 11050,5787.5 11125,5862.5 11237.5,5862.5 JP4.4@11312.5,5787.5
PIN17: JP4.6 U6.17 | length 535
  Bottom Layer w30: U6.17 11062.5,5887.5 11100,5925 11275,5925 JP4.6@11412.5,5787.5
PIN18: LS1.1 pad.0@11037.5,5987.5 pad.0@11037.5,7262.5 R32.1 R33.2 U6.18 | length 2250.9
  Top Layer w20: pad.0@11037.5,5987.5 pad.0@11037.5,7262.5
  Bottom Layer w30: LS1.1@10325,7312.5 10447.5,7190 R33.2 10887.5,7190 10952.5,7190 11025,7262.5 pad.0@11037.5,7262.5
  Bottom Layer w35: R32.1 10872.5,5987.5 pad.0@11037.5,5987.5
PUL0: JP6.7 R29.1 U6.11 | length 877.8
  Bottom Layer w20: JP6.7 10375,6287.5 10375,6062.5 10437.5,6000
  Bottom Layer w30: 10437.5,6000 U6.11@10652.5,6000 ; U6.11 10740,6077.5 R29.1
PUL1: JP6.5 R30.1 U6.12 | length 811.2
  Bottom Layer w20: JP6.5 10337.5,6225 10337.5,6037.5 10425,5950
  Bottom Layer w30: 10425,5950 10587.5,5950 U6.12 R30.1@10740,5887.5
PUL2: JP6.3 R1.1 U6.13 | length 794.4
  Bottom Layer w20: JP6.3 10300,6162.5 10300,6012.5 10412.5,5900
  Bottom Layer w30: 10412.5,5900 10537.5,5900 U6.13 10727.5,5787.5 R1.1
RE3: JP6.9 pad.0@10387.5,6462.5 pad.1@10450,6887.5 U6.1 | length 864.6
  Top Layer w30: pad.0@10387.5,6462.5 pad.1@10450,6887.5
  Bottom Layer w30: JP6.9 10300,6462.5 pad.0@10387.5,6462.5 ; pad.1@10450,6887.5 10550,6987.5 U6.1
U0: JP5.11 Q11.2 | length 803.6
  Bottom Layer w30: Q11.2 9925,7775 10375,7775 JP5.11@10475,7675
U1: JP5.13 Q6.2 | length 1009.6
  Bottom Layer w30: Q6.2 9850,7250 9850,7525 10050,7725 10325,7725 JP5.13@10375,7675
U2: JP5.12 Q4.2 | length 2389.4
  Bottom Layer w30: Q4.2 9850,5775 9850,6150 9900,6200 9900,6575 9950,6625 9950,6762.5 9887.5,6825 9887.5,6925 10012.5,7050 10012.5,7425 10062.5,7475 10400,7475 JP5.12
U3: JP5.15 Q10.2 | length 1426
  Bottom Layer w30: Q10.2 9850,6675 9850,6737.5 9787.5,6800 9787.5,6975 9912.5,7100 9912.5,7487.5 10075,7650 JP5.15
U4: JP5.16 Q8.2 | length 1783.4
  Bottom Layer w30: Q8.2 9850,6225 9850,6600 9900,6650 9900,6750 9837.5,6812.5 9837.5,6950 9962.5,7075 9962.5,7450 10062.5,7550 JP5.16
VCC: C8.1 C15.1 D7.2 JP6.1 R1.2 R29.2 R30.2 R32.2 U2.3 U6.20 U7.5 U7.6 U7.8 | length 4419.1
  Bottom Layer w30: JP6.1 10225,5987.5 10275,5937.5 U2.3 ; C8.1 10537.5,5637.5 10575,5600 10800,5600 ; R32.2 10800,5975 ; R1.2 10800,5775 ; R30.2 10800,5875 ; U6.20 C15.1 R29.2 10800,6027.5 10800,5975 ; D7.2 11450,6325 U7.8 ; U7.5 U7.6 11575,6200 11575,6337.5 ; U7.8@11500,6337.5 11575,6337.5 ; 10800,5600 11812.5,5600 11812.5,6337.5 11575,6337.5 ; 10800,5600 10800,5775 ; 10800,5775 10800,5875 ; 10800,5875 10800,5975
  Bottom Layer w75: U2.3 10362.5,5762.5 C8.1
VIN: C18.2 JP4.10 R13.2 | length 194.1
  Bottom Layer w30: R13.2 JP4.10 11610,5797.5 C18.2
VPP: C7.1 C10.1 L1.2 Q4.3 Q6.3 Q8.3 Q10.3 Q11.3 R3.2 R4.1 R17.2 R20.2 R23.2 R26.2 U2.1 U4.10 | length 10794.6
  Bottom Layer w25: 9575,5525 9987.5,5525 ; 9575,5537.5 9987.5,5537.5
  Bottom Layer w35: 9100,7312.5 9250,7312.5 ; 9575,5525 9575,5537.5 9575,5800 ; 9575,6600 R23.2 ; 9575,6700 Q10.3 ; 9575,7175 R17.2 ; Q4.3 9575,5800 ; Q8.3 R20.2 9575,6250 ; Q6.3 9575,7275 ; Q11.3 R26.2 9575,7725 9575,7275 ; 9575,5800 9575,6250 ; 9575,6250 9575,7275
  Bottom Layer w50: C10.1@8875,6612.5 8875,6512.5 ; 8900,7350 8900,7425 ; 8925,6612.5 8925,6512.5 ; 8937.5,7350 8937.5,7425 ; 9012.5,6512.5 8925,6512.5 ; 9012.5,6637.5 8837.5,6637.5 8837.5,6512.5 8875,6512.5 ; 9012.5,7200 8862.5,7350 8862.5,7425 8900,7425 ; 9087.5,7325 9087.5,7425 8937.5,7425 ; 9575,7275 9237.5,7275 9237.5,7312.5 9575,7312.5 ; U2.1 10075,5725 9987.5,5725 C7.1 9987.5,5537.5 11875,5537.5 11875,6425 U4.10 ; 8875,6512.5 8925,6512.5 ; 8900,7425 8937.5,7425
  Bottom Layer w80: 9050,7412.5 R4.1
  Bottom Layer w200: 9012.5,6587.5 9012.5,6637.5 9012.5,7200 9012.5,7325
VSENSE: U6.21 U7.1 U7.2 | length 412.5
  Bottom Layer w30: U6.21 11100,6287.5 11200,6287.5 U7.2 U7.1
pads on no net: H2.1 H3.1 H4.1 JP5.1 JP5.5 JP5.14 JP7.1 JP7.2 JP7.3 JP7.4 SW1.3 SW1.4 T1.7 T1.8 U6.14 U7.7
copper on no net: | length 1237.5
  Bottom Layer w15: 6800,5687.5 6800,5500 6950,5500 ; 6800,7675 6800,7862.5 6950,7862.5 ; 11762.5,7862.5 11912.5,7862.5 11912.5,7675 ; 11887.5,5500 11912.5,5500 11912.5,5700

## Other copper
Bottom Layer:
  rectangle net VPP: 8987.5,6487.5 9112.5,6675
  region net NetC2_2: 7800,6250 7337.5,6250 7337.5,5837.5 7800,5837.5
  rectangle net VPP: 9562.5,7275 9775,7450
  rectangle net VPP: 9562.5,6700 9750,6925
  rectangle net VPP: 9562.5,6312.5 9775,6437.5
  rectangle net VPP: 9562.5,5800 9775,5987.5

## Silkscreen, mask and mechanical layers (free items; w line width, h text height)
Top Overlay:
  circle w10: c8525,5825 r196.85
  lines w10: 6800,5500 11912.5,5500 11912.5,7862.5 6800,7862.5 6800,5500
  text "(+)" at 9906.25,6200 h35
  text "(-)" at 9906.25,6100 h35
  text "si o si 4x caps 4.7uF por cuestion de tamaño y no 2 de 10uF" at 6600,5262.5 h35
Bottom Overlay:
  the board outline again, w10
Mechanical 1:
  lines w15: 7175,5937.5 7800,5937.5 ; 7500,5587.5 7500,6212.5

## Dimensions
6800,7862.5 to 7600,7787.5 on Mechanical 1
6800,7862.5 to 8300,7787.5 on Mechanical 1
6800,5500 to 11912.5,7862.5 on Mechanical 1
11912.5,5500 to 6800,5500 on Mechanical 1